# Altium PCB delta-sigma_modulator.PcbDoc
Units mm, origin at the board's own origin, x right, y up, seen from the top; angles counter-clockwise.
Board outline 43.18 x 33.02 mm, 2 copper layers (Top Layer, Bottom Layer); 13 components, 9 nets, 39 pads, 0 vias.
Unrouted connection lines stored in the file: 4.
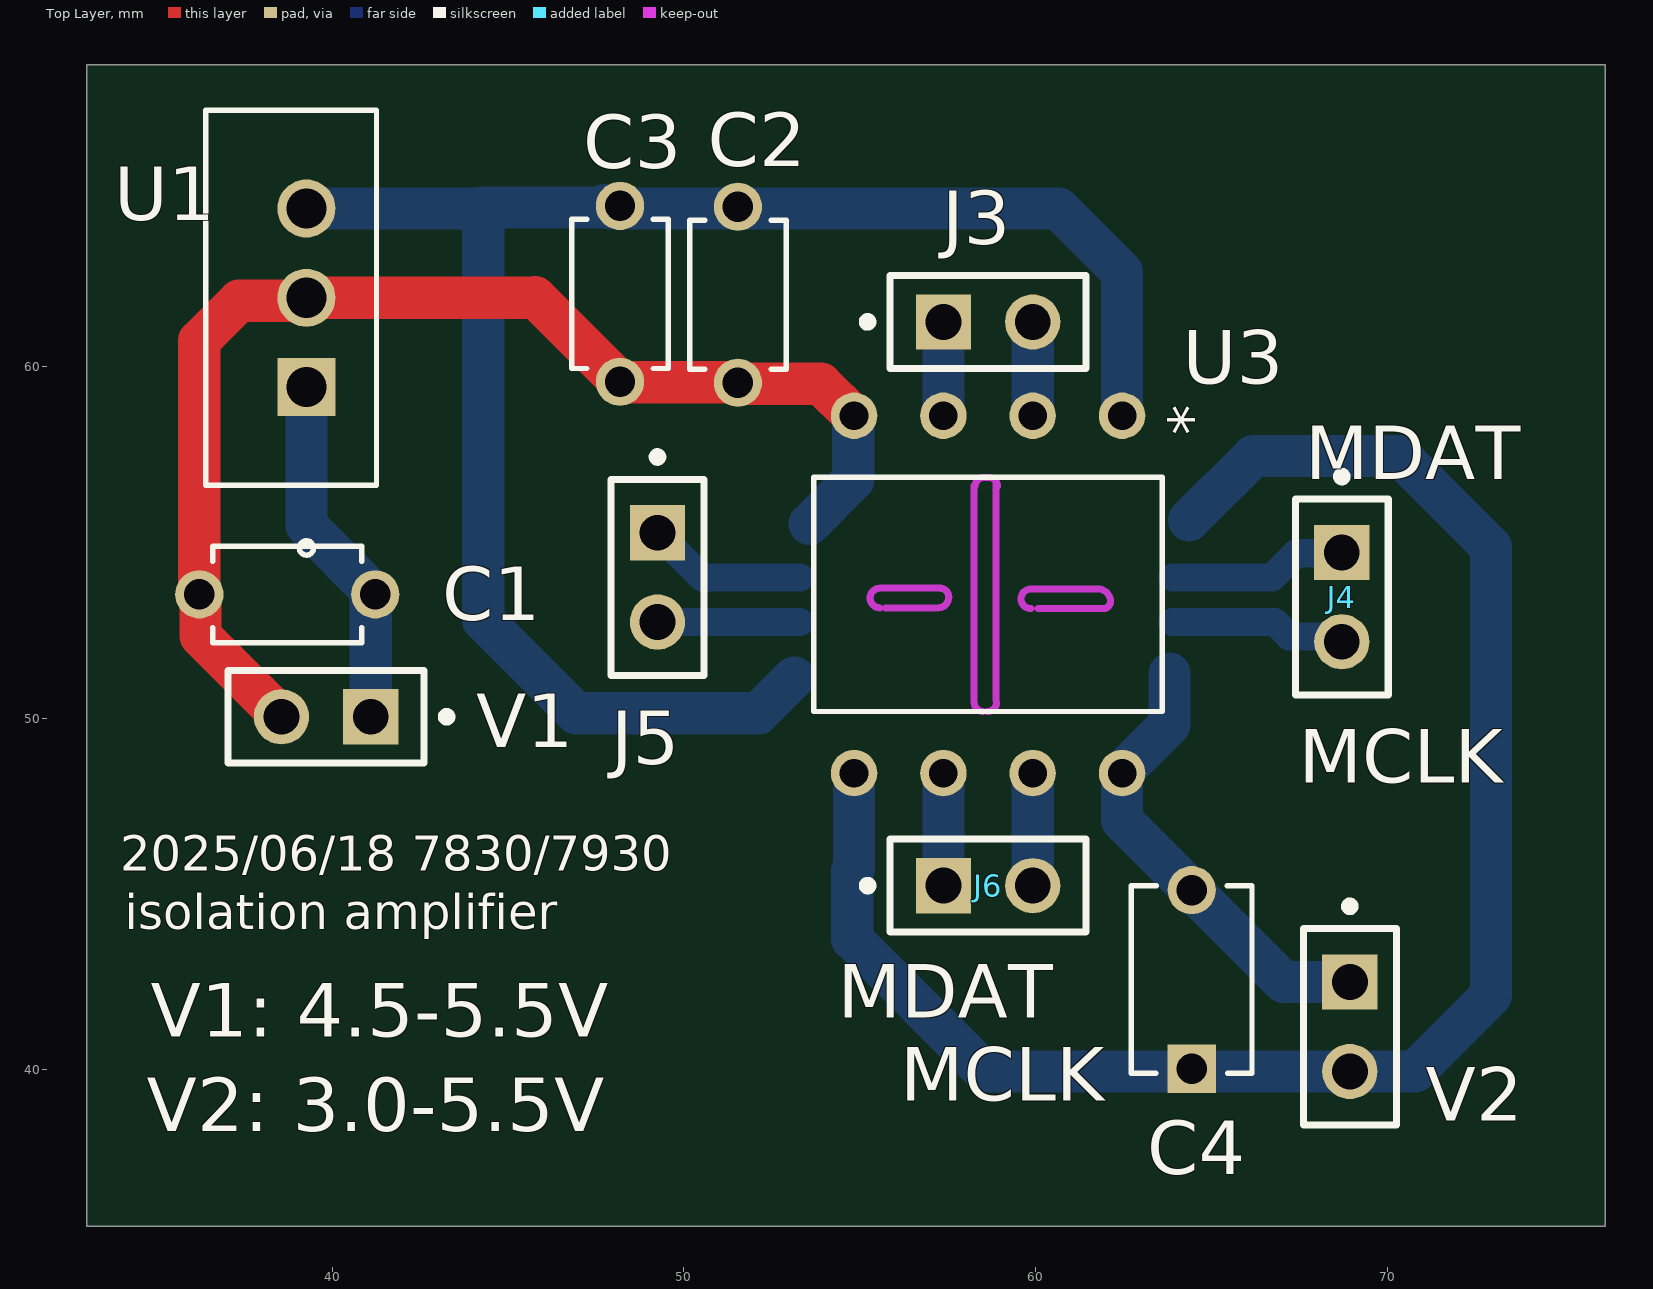
[diagram p0: Top Layer view]
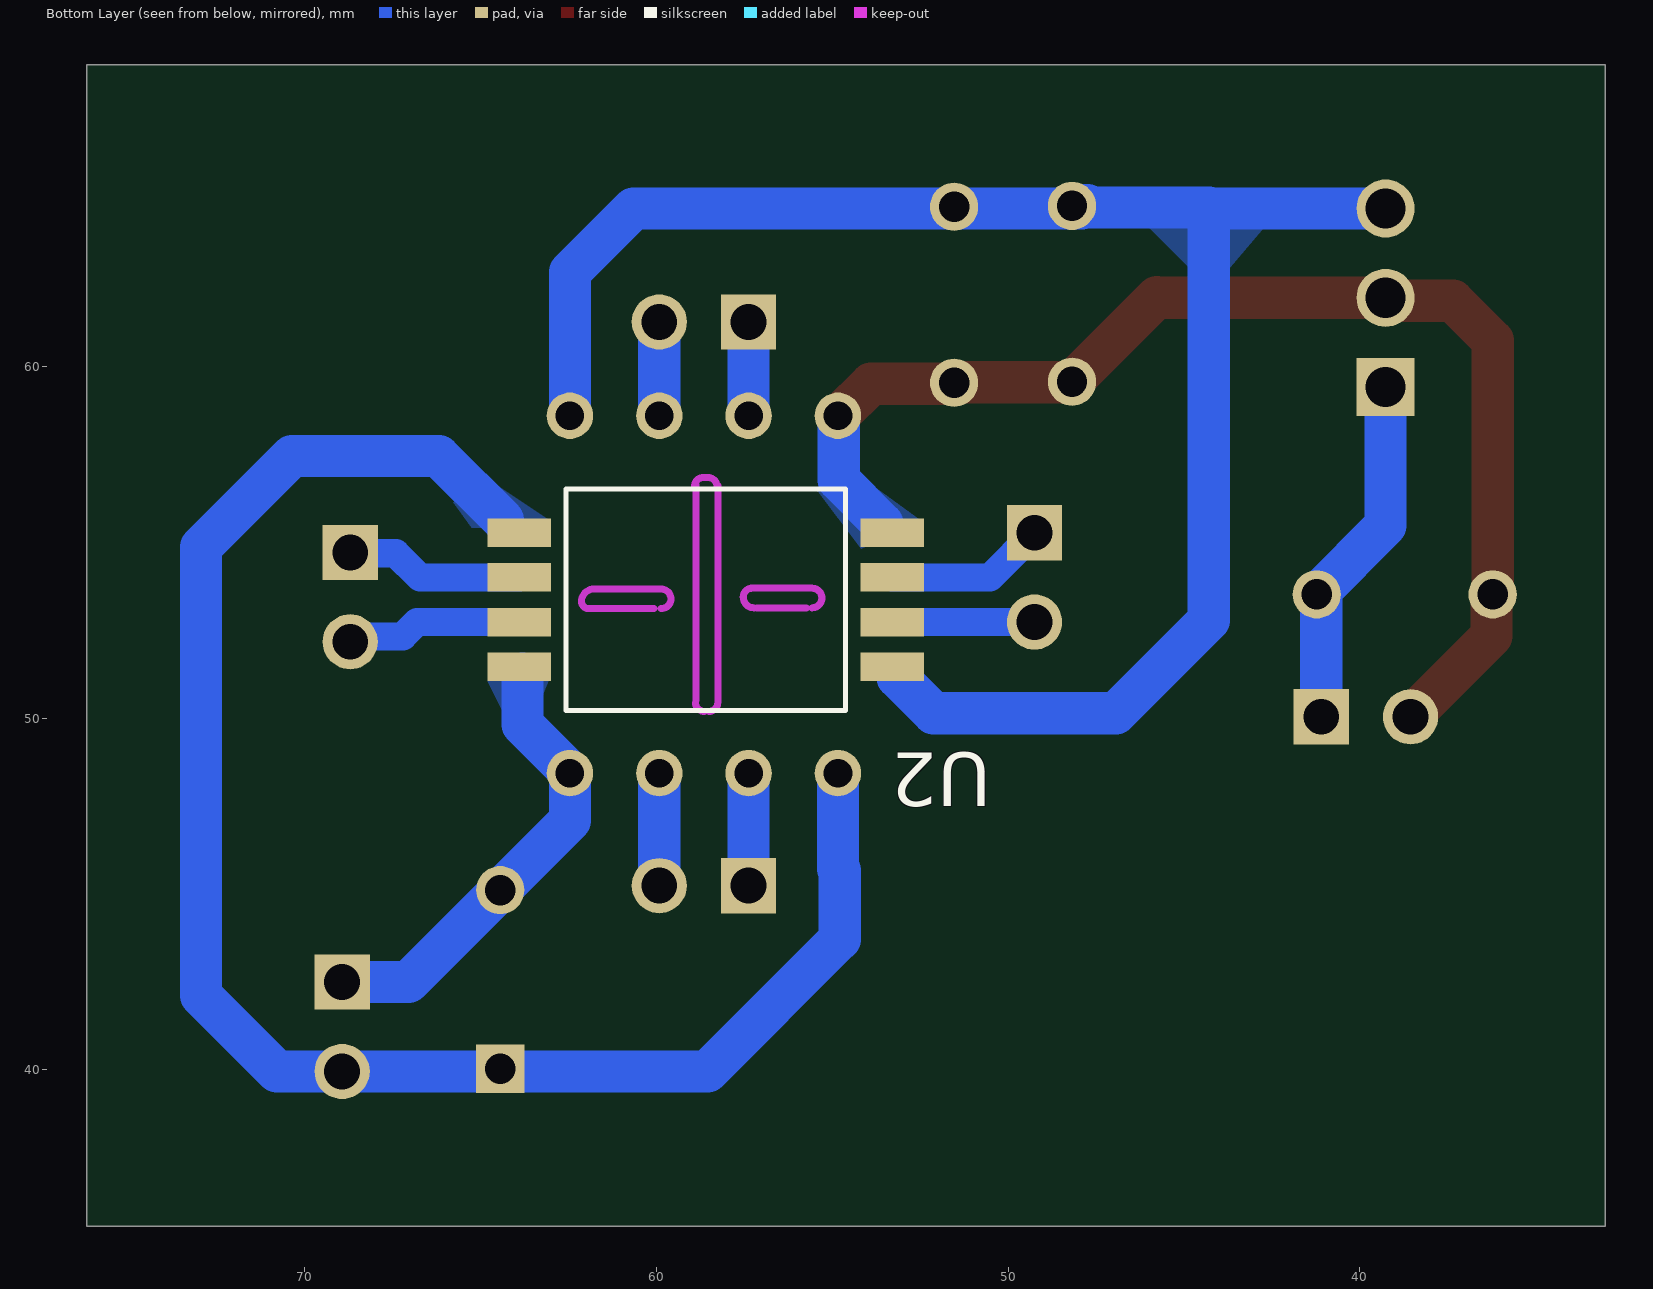
[diagram p1: Bottom Layer view, seen from below]
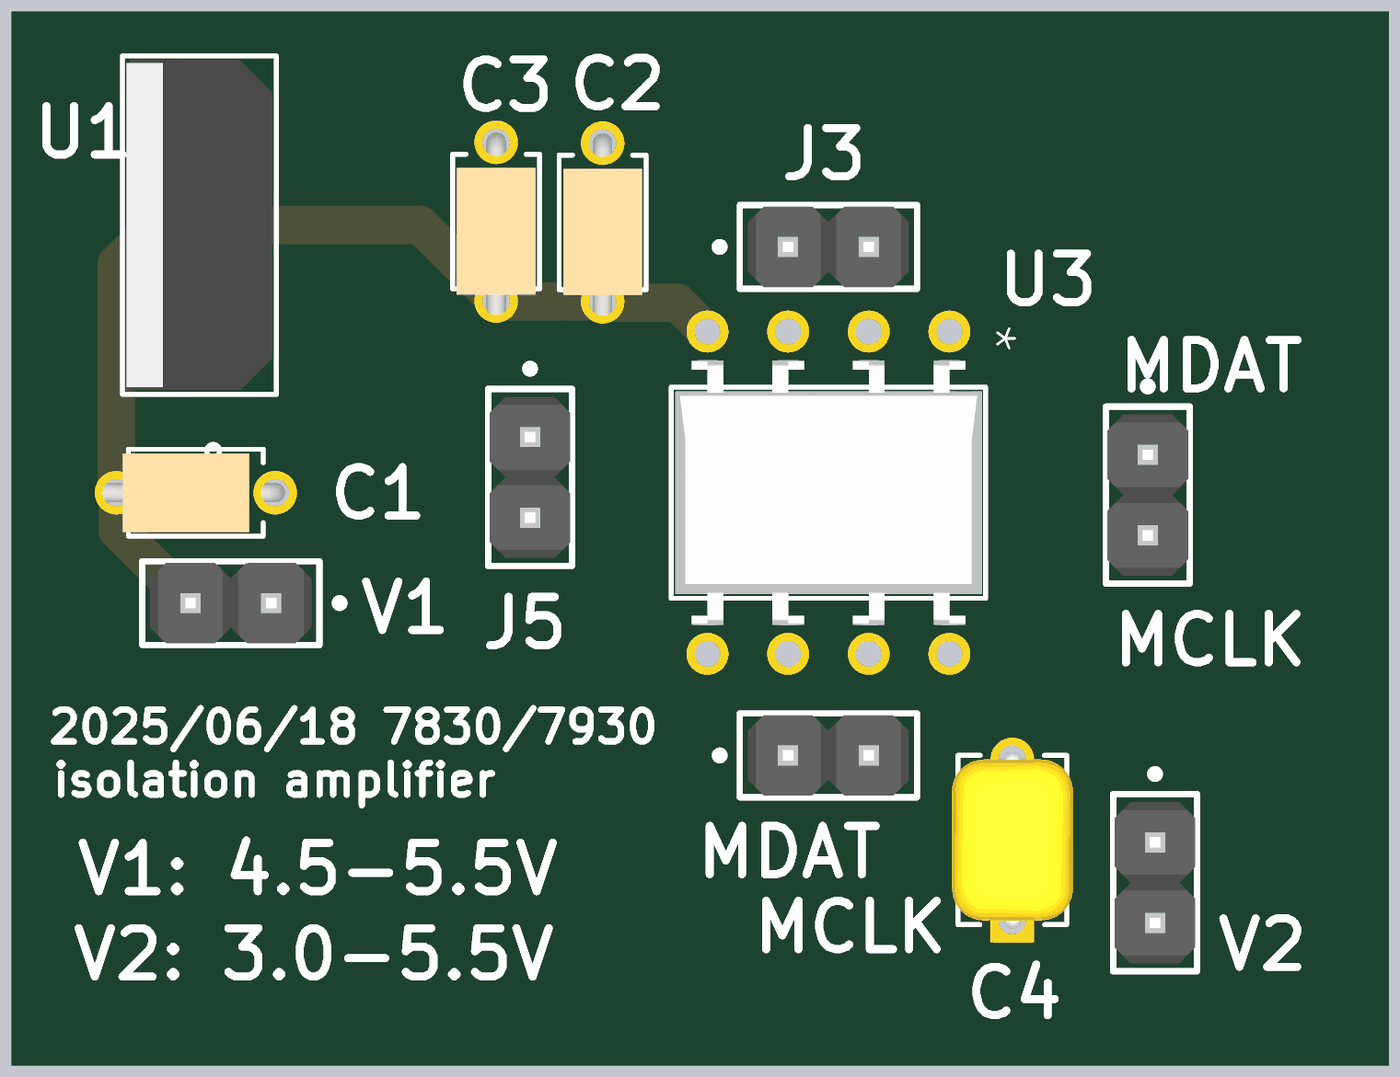
[diagram p2: 3D render of the assembled board from above, using the file's embedded part models]

## Layer stack, top to bottom
Top Solder: solder mask 0.0102, Solder Resist, Dk 3.5
Top Layer: signal copper 0.0356
Dielectric 1: dielectric 0.32, FR-4, Dk 4.8
Bottom Layer: signal copper 0.0356
Bottom Solder: solder mask 0.0102, Solder Resist, Dk 3.5

## Board outline
33.02,35.56 76.2,35.56 76.2,68.58 33.02,68.58

## Design rules (kind name [scope] priority, off if disabled: settings)
Clearance [All] p1: gap=0 ignorepadtopadclearanceinfootprint=TRUE
ComponentClearance [All] p1: gap=0 collisioncheckmode=3 verticalgap=0 showdistances=FALSE
PlaneConnect [All] p1: planeconnectstyle=Direct reliefexpansion=0.508 reliefentries=4 reliefconductorwidth=0.254 reliefairgap=0.254
PolygonConnect [All] p1: connectstyle=Direct reliefconductorwidth=0.254 reliefentries=4 polygonreliefangle="90 Angle" airgapwidth=0.254
RoutingVias [All] p1: holewidth=0 width=1 viastyle="Through Hole" minholewidth=0 minwidth=1 maxholewidth=1 maxwidth=2.7
ShortCircuit [All] p1: allowed=TRUE
SolderMaskExpansion [All] p1: expansion=0.102 istentingtop=FALSE
Width [All] p1: maxlimit=2 minlimit=0.254 preferedwidth=1.2 minimp=50.000000 maximp=50.000000 favimp=50.000000
27 further rules are at their usual default settings.

## Components (designator, comment, footprint, x,y, rotation, side; value= is the part's Value field where it differs from the comment)
C1 "330pF" CAP_FG28_TDK 36.224,53.518 r0 top
C2 "110pF" CAP_FG28_TDK 51.537,59.538 r90 top
C3 "110pF" CAP_FG28_TDK 48.184,59.563 r90 top
C4 "10pF" CAP_C322C511_MR_KEM 64.44,40.03 r90 top
J3 "M20-9990246" FP-M20-9990246-MFG 58.649,61.265 r0 top
J4 "M20-9990246" FP-M20-9990246-MFG 68.707,53.442 r270 top
J5 "M20-9990246" FP-M20-9990246-MFG 49.251,54 r270 top
J6 "M20-9990246" FP-M20-9990246-MFG 58.649,45.237 r0 top
U1 "L7805CV" TO-220_STM 39.268,59.411 r90 top
U2 "TLP7830TP4,E" SO8L_TOS 58.598,53.365 r0 bottom
U3 "TLP7930" DIP8_TOS 62.459,58.598 r270 top
V1 "M20-9990246" FP-M20-9990246-MFG 39.827,50.038 r180 top (schematic designator J1)
V2 "M20-9990246" FP-M20-9990246-MFG 68.936,41.224 r270 top (schematic designator J2)

## Footprints (in the part's own frame and the unit in brackets; to place one, negate y for a bottom-side part, rotate by r counter-clockwise, add the part's x,y. Pads: shape width x height; smd on the part's side, far side on the other; paste and mask are expansions set on the pad)
CAP_C322C511_MR_KEM [mil]
  rect 54x54 / inner round 60 / far side rect 54x54 hole 34 paste-27 mask+0: 1(0,0)
  round 54 / inner round 60 / far side round 54 hole 34 paste-27 mask+0: 2(200,0)
  silkscreen extent -5,-68 205,68, body extent -10,-75 210,75, height 190
CAP_FG28_TDK [mil]
  round 54 / inner round 60 / far side round 54 hole 34 paste-27 mask+0: 1(0,0) 2(196.85,0)
  silkscreen extent 15,-54 182,54, body extent -36,-49 209,49, height 217
DIP8_TOS [mil]
  round 52 / inner round 60 / far side round 52 hole 32 paste-26 mask+0: 1(0,0) 2(0,-100) 3(0,-200) 4(0,-300) 5(400,-300) 6(400,-200) 7(400,-100) 8(400,0)
  silkscreen extent 69,-345 331,45, body extent 31,-340 369,40, height 175
FP-M20-9990246-MFG [mm]
  rect 1.57x1.57 hole 1.02 paste-1000 mask+0: 1(-1.27,0)
  round 1.57 hole 1.02 paste-1000 mask+0: 2(1.27,0)
  silkscreen extent -3.55,-1.32 2.79,1.32, body extent -2.89,-1.42 2.89,1.42, height 0.25
SO8L_TOS [mil]
  rect 71x32 smd paste+0 mask+0: 1(-208.66,75) 2(-208.66,25) 3(-208.66,-25) 4(-208.66,-75) 5(208.66,-75) 6(208.66,-25) 7(208.66,25) 8(208.66,75)
  silkscreen extent -156,-124 156,124, body extent -230,-119 230,119, height 87
TO-220_STM [mil]
  rect 65x65 / inner round 60 / far side rect 65x65 hole 45 paste-32.5 mask-32.5: 1(0,0)
  round 65 / inner round 60 / far side round 65 hole 45 paste-32.5 mask-32.5: 2(100,0) 3(200,0)
  silkscreen extent -188,-78 310,113, body extent -105,-74 305,108, height 776

## Part data
C1: library part FG28C0G1H331JNT06, "No Description Available", Mfr_Name=TDK
C2 C3: library part FG28C0G1H100DNT06, "No Description Available", Mfr_Name=TDK
C4: library part C322C111JDG5TA, "No Description Available", Mfr_Name=Kemet
J3 J4 J5 J6 V1 V2: library part CMP-15831-000009-1, "CONN HEADER VERT 2POS 2.54MM", Current Rating=3A, Manufacturer=Harwin, Temperature="-40°C to +105°C", Temperature Range High=+105°C, Temperature Range Low=-40°C, Automotive=No, Category=Conn, ComponentLink2Description=Datasheet, ComponentLink2URL=https://cdn.harwin.com/pdfs/M20-999.pdf, Conn Gender=Male, Conn Orientation=Vertical, Contact Material=Tin,Nickel, Device Class L1=Connectors, Device Class L2="Headers and Wire Housings", Device Class L3=unset, Digikey Description="CONN HEADER VERT 2POS 2.54MM", Height=8.99mm, Lead Free=Yes, Manufacturer Part Number=M20-9990246, Mouser Description="2.54mm (0.1\") Pitch SIL Vertical PC Tail Pin Header, 6.1mm mating pin height, tin, 2 contacts", Number Of Contacts=2, Number Of Rows=1, Octopart=https://octopart.com/m20-9990246-harwin-2590635, Package=M20-9990246, Pitch=2.54mm, RoHS=TRUE
U1: "Linear Voltage Regulator, Fixed, Positive Output, 35 V, 5 V, 1.5 A, 3 Pins, TO-220", Case/Package=TO-220, Dropout Voltage=2V, Manufacturer=STMicroelectronics, Max Input Voltage=35V, Max Operating Temperature=125°C, Max Output Current=1.5A, Min Input Voltage=7V, Min Operating Temperature=-40°C, Min Output Voltage=4.65V, Nominal Output Voltage=5V, Power Supply Rejection Ratio (PSRR)=62dB, Quiescent Current=8mA, Supplier Part Number 1=497-1443-5-ND, Tolerance=5%, Category="Voltage Regulators - Linear", ComponentLink1Description=https://datasheet.ciiva.com/29156/156048-da-01-en-spannungsregler-l-7805-cv-to220-stm-29156924.pdf?src-supplier=Conrad, ComponentLink1URL=https://datasheet.ciiva.com/29156/156048-da-01-en-spannungsregler-l-7805-cv-to220-stm-29156924.pdf?src-supplier=Conrad, ComponentLink2Description=https://datasheet.ciiva.com/6884/1805459-6884463.pdf?src-supplier=Newark, ComponentLink2URL=https://datasheet.ciiva.com/6884/1805459-6884463.pdf?src-supplier=Newark, ComponentLink3Description=https://datasheet.ciiva.com/2073/cd00000444-2073087.pdf?src-supplier=Digikey, ComponentLink3URL=https://datasheet.ciiva.com/2073/cd00000444-2073087.pdf?src-supplier=Digikey, ComponentLink4Description=https://datasheet.ciiva.com/16458/cd00000444-16458159.pdf?src-supplier=Future+Electronics, ComponentLink4URL=https://datasheet.ciiva.com/16458/cd00000444-16458159.pdf?src-supplier=Future+Electronics, Contact Plating=Gold, Height=9.15mm, Lead Free="Lead Free", Length=10.4mm, Manufacturer Part Number=L7805CV, Mfr_Name=STMicroelectronics, Mount="Through Hole", Number of Channels=1, Number of Outputs=1, Number of Pins=3, Number of Regulators=1, Output Current=1.5A, Output Type=Fixed, Output Voltage=5V, Polarity=Positive, Pricing 1="1=0.53, 10=0.375, 50=0.3118, 100=0.2922, 250=0.27136, 500=0.2588, 1000=0.24847, 2500=0.23757, 5000=0.23099 (USD)", Radiation Hardening=No, Reach SVHC Compliant=No, RefDes=RefDes, RoHS=No, Stock 1=39349, Supplier 1=Digikey, Type=Type, Weight=2.299997g, Width=4.6mm
U2: "Isolation Amplifier Single 5000Vrms 5V 8-Pin SOIC T/R", Manufacturer=Toshiba, Manufacturer Part Number=TLP7830(TP4,E, Mfr_Name="Toshiba Electronic Devices & Storage Corp.", Number_devices_in_Package=1, Source_Package=TLP7830, Supplier Part Number 1=TLP7830(TP4ECT-ND, Category="Linear ICs", Pricing 1="1=6.34, 10=4.768, 100=3.8437, 500=3.519 (USD)", RefDes=Refdes, RoHS=Yes, RoHS Compliant=Yes, Stock 1=1205, Supplier 1=Digikey, Type=Type
U3: "No Description Available", Mfr_Name="Toshiba Electronic Devices & Storage Corp.", RefDes=RefDes, Type=Type

## Nets (pads, with @x,y where several pads share a name; then routed paths per layer and width w, separated by ;. In a path a pad name is that pad's centre, name@x,y a point inside that pad or via, vN(x,y) a via of type N, cw(c..) or ccw(c..) an arc to the next point about the centre after c; other vN are vias at no path point)
+Vin: J3.2 J5.2 U2.2 U3.2 | length 6.7
  Bottom Layer w0.8: J5.2 53.285,52.73 53.291,52.737 U2.2
  Bottom Layer w1.2: U3.2 J3.2
-Vin: J3.1 J5.1 U2.3 U3.3 | length 7.2
  Bottom Layer w0.8: J5.1 50.521,54 U2.3
  Bottom Layer w1.2: U3.3 J3.1@57.379,61.214
GND1: C1.1 C2.1 C3.1 U1.2 U2.4 U3.4 V1.2 | length 35.8
  Top Layer w1.2: V1.2 36.257,52.338 36.257,53.485 C1.1 36.224,60.735 37.353,61.864 39.182,61.864 U1.2 45.771,61.951 ; 45.771,61.976 C3.1 48.197,59.55 51.524,59.55 C2.1 51.569,59.505 53.899,59.505 54.806,58.598 U3.4
  Bottom Layer w1.2: U2.4@53.569,55.524 54.815,56.771 54.815,58.575 U3.4
GND2: C4.1 U2.5 U3.5 V2.2 | length 48.5
  Bottom Layer w1.2: U3.5 54.839,45.716 54.788,45.666 54.788,43.713 58.547,39.954 64.44,39.954 70.79,39.954 72.949,42.113 72.949,54.864 70.358,57.455 66.19,57.455 U2.5@64.363,55.627
MCLK: J4.2 J6.2 U2.7 U3.7 | length 8.2
  Bottom Layer w0.8: U2.7 66.802,52.73 67.213,52.319 68.56,52.319 J4.2
  Bottom Layer w1.2: J6.2 U3.7
MDAT: J4.1 J6.1 U2.6 U3.6 | length 8.3
  Bottom Layer w0.8: U2.6 66.726,54 67.412,54.686 68.682,54.686 J4.1
  Bottom Layer w1.2: U3.6 J6.1 J6.1@57.399,45.257
NetC1_2: C1.2 U1.1 V1.1 | length 10.2
  Bottom Layer w1.2: U1.1 39.268,55.474 C1.2 41.224,53.471 41.097,53.344 V1.1
NetC2_2: C2.2 C3.2 U1.3 U2.1 U3.1 | length 50.2
  Bottom Layer w1.2: U1.3 44.298,64.491 ; C3.2@47.752,64.516 44.298,64.516 44.298,52.781 46.939,50.14 52.121,50.14 U2.1@53.137,51.156 ; C3.2@47.752,64.588 47.798,64.588 47.896,64.491 51.537,64.491 60.655,64.491 62.459,62.687 U3.1
NetC4_2: C4.2 U2.8 U3.8 V2.1 | length 13.1
  Bottom Layer w1.2: U2.8@63.805,51.267 63.805,49.817 62.459,48.47 62.459,47.092 67.056,42.494 V2.1

## Polygon pours and split planes (outlines as drawn)
NetC2_2 on Bottom Layer "NETC2_2_L02_P018" (solid, pour order 18): 42.723,63.957 45.974,63.957 45.974,63.932 44.679,62.636 43.84,62.636
GND1 on Bottom Layer "GND1_L02_P006" (solid, pour order 6): 52.451,55.601 54.229,56.896 55.448,56.49 54.178,54.813
GND2 on Bottom Layer "GND2_L02_P007" (solid, pour order 7): 63.043,55.626 64.676,56.714 65.781,56.137 64.846,54.839
NetC4_2 on Bottom Layer "NETC4_2_L02_P008" (solid, pour order 8): 63.068,51.079 63.424,50.216 64.389,50.216 64.795,51.054

## Keep-outs
Keep-Out Layer:
  lines w0.2: 55.575,53.137 cw(c55.575,53.416) 55.296,53.416 cw(c55.575,53.416) 55.575,53.696 55.753,53.696 57.201,53.696 57.277,53.696 cw(c57.277,53.442) 57.531,53.442 cw(c57.226,53.442) 57.226,53.137 ; 55.728,53.137 57.15,53.137 ; 58.255,50.444 ccw(c58.509,50.444) 58.509,50.19 ; 58.255,50.47 58.255,56.617 ; 58.28,56.591 cw(c58.534,56.591) 58.534,56.845 58.661,56.845 cw(c58.661,56.591) 58.915,56.591 ; 58.636,50.19 ccw(c58.636,50.444) 58.89,50.444 ; 58.877,50.495 58.877,56.642 ; 59.868,53.111 cw(c59.868,53.391) 59.588,53.391 cw(c59.868,53.391) 59.868,53.67 60.046,53.67 ; 60.071,53.111 61.697,53.111 ; 60.096,53.67 61.722,53.67 ; 61.671,53.111 61.951,53.111 ; 61.773,53.67 cw(c61.773,53.315) 62.128,53.315 cw(c61.925,53.315) 61.925,53.111

## Silkscreen, mask and mechanical layers (free items; w line width, h text height)
Top Overlay:
  text "MDAT" at 67.666,56.794 h1.52
  text "MCLK" at 67.488,48.158 h1.52
  text "2025/06/18 7830/7930" at 33.982,45.666 h1
  text "isolation amplifier" at 34.109,43.993 h1
  text "MDAT" at 54.381,41.478 h1.52
  text "V1: 4.5-5.5V" at 34.849,40.945 h1.52
  text "MCLK" at 56.159,39.116 h1.52
  text "V2: 3.0-5.5V" at 34.722,38.252 h1.52
Board:
  the board outline again, w0.2

## Text inside footprints (layer, text, board x,y; h text height)
U3: Top 3D Body "*" at 61.824,56.782 h1.27 r270; Top Overlay "*" at 63.246,58.915 h1.27 r270